# Altium PCB klor1_4_B.PcbDoc (part 2 of 2)
Units mm, origin at the board's own origin, x right, y up, seen from the top; angles counter-clockwise.
Board outline 323.11 x 118.19 mm, 2 copper layers (Top Layer, Bottom Layer); 172 components, 130 nets, 808 pads, 101 vias.
Unrouted connection lines stored in the file: 161.
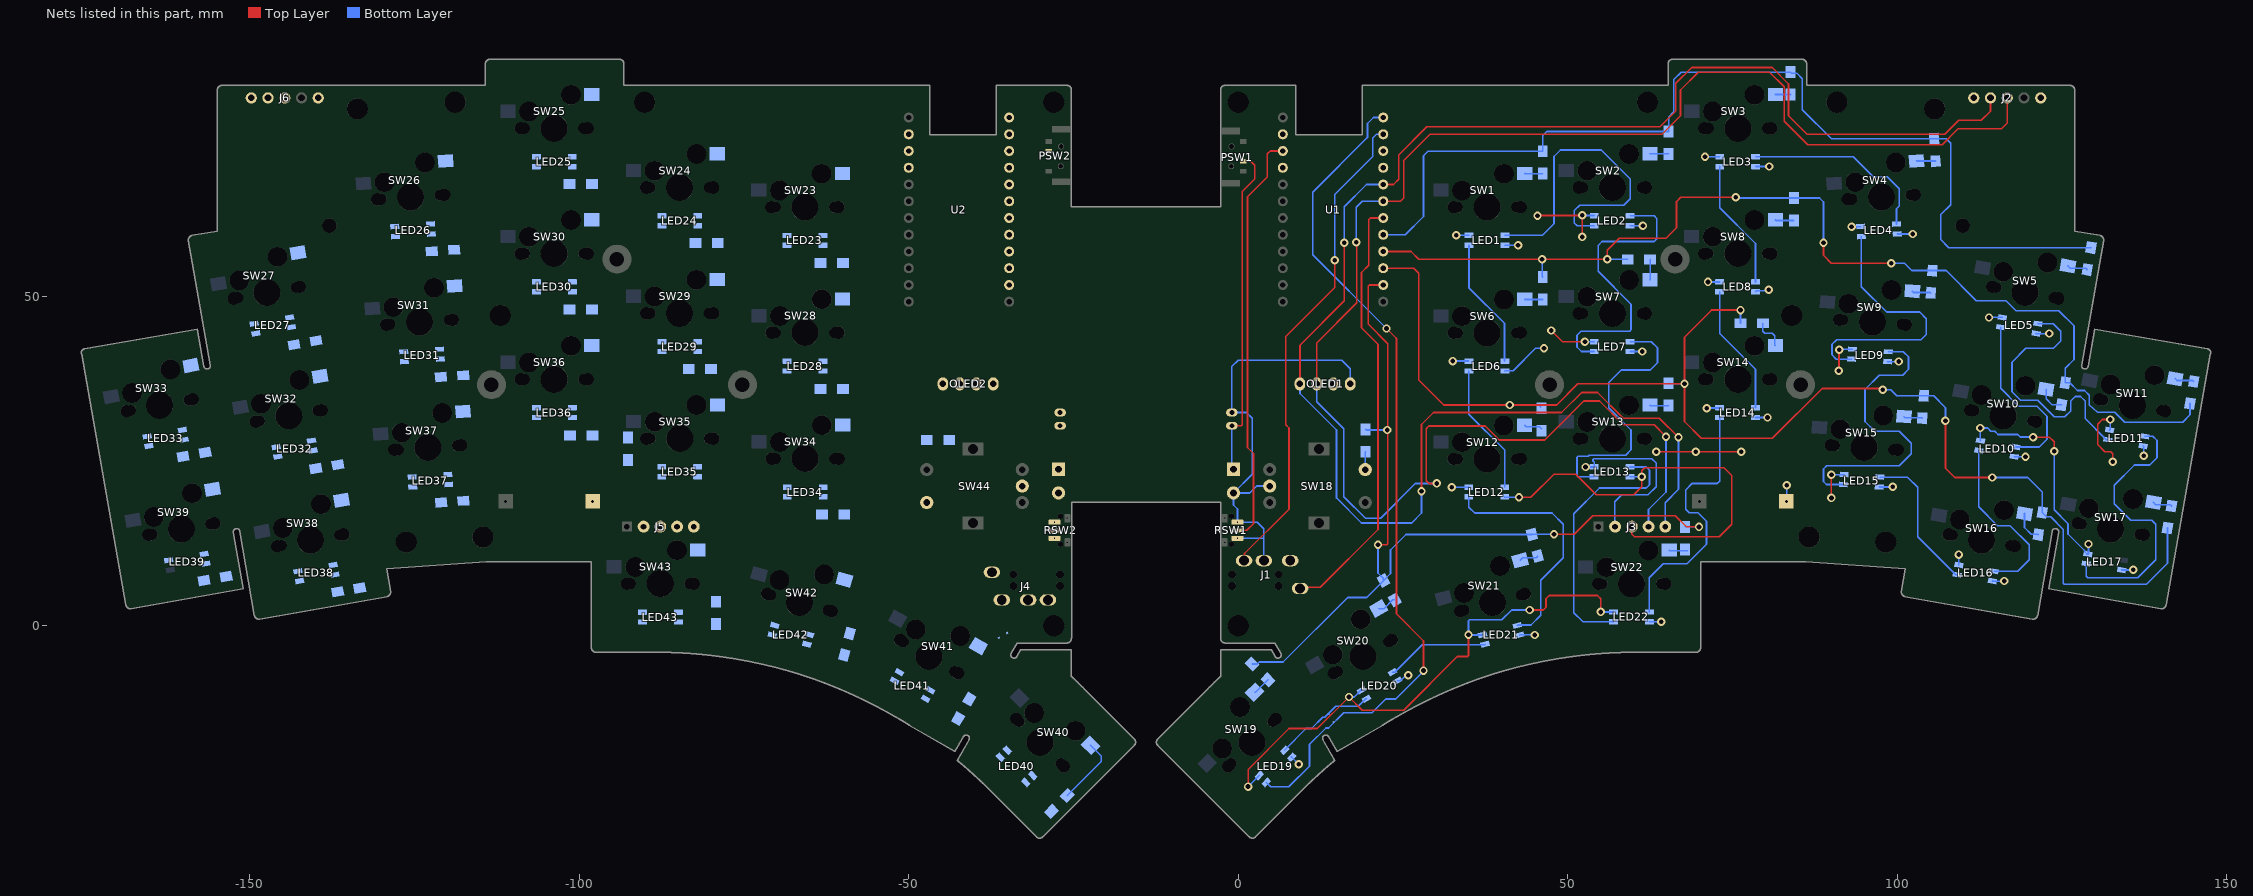
[diagram p2: the nets of this part, all layers, seen from the top]

## Via types
v1: diameter 1.27, hole 0.711, Top Layer to Bottom Layer, 101 vias

## Nets (pads, with @x,y where several pads share a name; then routed paths per layer and width w, separated by ;. In a path a pad name is that pad's centre, name@x,y a point inside that pad or via, vN(x,y) a via of type N, cw(c..) or ccw(c..) an arc to the next point about the centre after c; other vN are vias at no path point) (continued)
GND_R: BT1.2 BT2.2 BZ1.2 J1.2 J2.5 J3.2 LED1.2 LED2.2 LED3.2 LED4.2 LED5.2 LED6.2 LED7.2 LED8.2 LED9.2 LED10.2 LED11.2 LED12.2 LED13.2 LED14.2 LED15.2 LED16.2 LED17.2 LED19.2 LED20.2 LED21.2 LED22.2 OLED1.1 RSW1.1 SW18.C U1.3 U1.4 U1.23 | length 288.5
  Top Layer w0.254: v1(1.49,-24.4) 1.49,-21.81 7.7,-15.6 12,-15.6 v1(16.8,-10.8) 18.8,-12.8 25.1,-12.8 33.243,-4.657 34.794,-4.657 34.943,-4.508 v1(34.943,-1.357) ; v1(44.2,2.4) 46.3,2.4 46.7,2.8 46.7,4.1 47.2,4.6 54.5,4.6 55,4.1 v1(55,2.1) ; v1(45.4,62.2) 45.45,62.25 52.15,62.25 v1(52.2,62.3) 52.2,62.2 v1(52.2,59) ; v1(47.5,44.8) 49.2,43.1 v1(52.6,43.1) ; v1(63.4,26.4) v1(69.4,26.4) v1(76.3,26.4) ; v1(90,19.4) v1(90,22.9) ; v1(91.1,38.7) 91.15,38.75 91.15,41.85 v1(91.2,41.9) ; v1(120.6,28.6) 123.1,28.6 123.8,27.9 v1(123.8,26.5) ; v1(132.3,31.3) 131.1,31.3 130.4,30.6 130.4,27.5 131.5,26.4 132.4,26.4 132.7,26.1 v1(132.7,24.9)
  Bottom Layer w0.254: RSW1.1@-0.11,13.265 3.815,13.265 3.88,13.2 ; v1(1.49,-24.4) LED19.2@3.175,-22.715 ; J1.2@3.88,9.875 3.88,13.2 ; SW18.C@4.77,21.2 2.8,21.2 1.75,20.15 BT2.2@-0.725,20.15 ; v1(16.8,-10.8) 17.576,-10.8 18.598,-9.778 LED20.2@18.695,-9.778 ; OLED1.1@16.979,36.695 16.979,39.021 15.7,40.3 0,40.3 -0.97,39.33 BT1.2@-0.97,32.35 1.25,32.35 2.1,31.5 2.1,22.975 BT2.2@-0.725,20.15 ; v1(32.4,21) 32.424,21.024 34.954,21.024 LED12.2@34.978,21.047 ; v1(32.562,40.162) LED6.2@34.995,40.162 ; v1(33.056,59.256) LED1.2@34.997,59.256 ; LED21.2@37.055,-1.357 37.021,-1.391 34.977,-1.391 v1(34.943,-1.357) 34.943,0.743 35.1,0.9 40,0.9 41.5,2.4 v1(44.2,2.4) ; v1(52.2,62.3) 52.251,62.249 53.967,62.249 LED2.2@54.018,62.197 ; v1(52.6,43.1) 52.609,43.109 53.999,43.109 LED7.2@54.008,43.117 ; v1(52.7,24.1) LED13.2@53.993,24.1 ; LED13.2@53.994,24.099 53.994,24.838 53.825,25.007 53.825,25.217 53.974,25.366 62.734,25.366 63.4,24.7 63.4,21.1 62.168,19.867 58.167,19.867 57.135,18.835 57.135,15.085 J3.2@57.17,15.05 ; v1(55,2.1) 55.005,2.095 56.927,2.095 LED22.2@56.932,2.09 ; v1(70.823,71.177) LED3.2@73.058,71.177 ; v1(71.1,33) 71.15,33.05 72.995,33.05 LED14.2@73.044,33.099 ; v1(71.272,52.172) LED8.2@73.044,52.172 ; BZ1.2@83.175,18.86 83.2,18.885 v1(83.2,21.3) ; v1(90,22.9) 90.024,22.924 91.919,22.924 LED15.2@91.925,22.929 ; v1(91.2,41.9) 91.239,41.939 93.164,41.939 LED9.2@93.185,41.959 ; LED4.2@99.981,59.443 99.991,59.452 102.334,59.452 v1(102.343,59.443) ; v1(109.3,10.8) 109.3,9.252 LED16.2@109.333,9.22 ; LED10.2@112.62,28.082 112.6,28.102 v1(112.6,30) 113.7,30 114.2,29.5 114.8,29.5 115.279,29.021 118.279,29.021 118.657,28.643 120.557,28.643 v1(120.6,28.6) ; v1(113.92,46.78) 113.943,46.803 115.92,46.803 LED5.2@115.943,46.78 ; J2.5@121.76,80.1 J2.5@121.77,80.09 ; v1(123.8,26.5) 123.8,17.6 125.9,15.5 125.9,13.922 128.398,11.424 128.398,11.287 128.785,10.9 LED17.2@128.923,10.9 129,10.977 v1(129,12.4) ; LED11.2@132.203,29.7 132.3,29.797 v1(132.3,31.3) ; BT2.2@-0.725,20.15 -0.725,18.325 -0.11,17.71 RSW1.1@-0.11,15.715 2.885,15.715 3.88,14.72 3.88,13.2
LED: JP26.2 LED19.3 U1.1 | length 129.6
  Top Layer w0.254: v1(22.5,45.1) 23.926,43.674 24,43.6 24,1.8 28.1,-2.3 v1(28.1,-6.8)
  Bottom Layer w0.254: LED19.3@4.236,-23.776 4.906,-24.446 7.654,-24.446 10.8,-21.3 10.8,-18 13.3,-15.5 13.7,-15.5 16,-13.2 20.3,-13.2 22.381,-11.119 23.881,-11.119 28.1,-6.9 v1(28.1,-6.8) ; U1.1@21.999,77.114 20.514,77.114 19.6,76.2 19.6,74.1 11.3,65.8 11.3,56.3 v1(22.5,45.1)
LED_L: JP29.2 LED40.3 U2.1
NetBT1_1: BT1.1 BT2.1 PSW1.2 | length 50.5
  Top Layer w0.254: BT1.1@-0.97,30.35 0.443,30.35 0.592,30.499 0.592,65.892 2.5,67.8 2.5,69.887 1.9,70.487 0.794,70.487 PSW1.2@0.781,70.474
  Bottom Layer w0.254: BT1.1@-0.97,30.35 -0.97,23.995 BT2.1@-0.725,23.75
NetBT3_1: BT3.1 BT4.1 PSW2.2
NetD1_2: D1.2 SW1.2 | length 2.8
  Bottom Layer w0.254: SW1.2@43.465,68.64 43.505,68.6 D1.2@46.2,68.6
NetD2_2: D2.2 SW2.2 | length 2.8
  Bottom Layer w0.254: SW2.2@62.465,71.62 62.485,71.6 D2.2@65.3,71.6
NetD3_2: D3.2 SW3.2 | length 2.3
  Bottom Layer w0.254: SW3.2@81.505,80.6 D3.2@83.8,80.6
NetD4_2: D4.2 SW4.2 | length 2.9
  Bottom Layer w0.254: SW4.2@102.914,70.545 102.944,70.515 105.808,70.515 D4.2@105.819,70.504
NetD5_2: D5.2 SW5.2 | length 3.1
  Bottom Layer w0.254: SW5.2@125.897,54.592 126.247,54.243 128.588,54.243 D5.2@128.805,54.026
NetD6_2: D6.2 SW6.2 | length 2.8
  Bottom Layer w0.254: SW6.2@43.463,49.547 43.51,49.5 D6.2@46.2,49.5
NetD7_2: D7.2 SW7.2 | length 3.1
  Bottom Layer w0.254: SW7.2@62.476,52.502 62.5,52.526 D7.2@62.5,55.6
NetD8_2: D8.2 SW8.2 | length 2.8
  Bottom Layer w0.254: SW8.2@81.491,61.595 81.586,61.5 D8.2@84.3,61.5
NetD9_2: D9.2 SW9.2 | length 2.9
  Bottom Layer w0.254: SW9.2@102.268,50.77 102.458,50.58 105.005,50.58 D9.2@105.081,50.504
NetD10_2: D10.2 SW10.2 | length 4.2
  Bottom Layer w0.254: SW10.2@122.575,35.895 122.575,34.425 123.474,33.526 D10.2@124.905,33.526
NetD11_2: D11.2 SW11.2 | length 3
  Bottom Layer w0.254: SW11.2@142.157,37.512 142.443,37.227 144.843,37.227 D11.2@144.995,37.074
NetD12_2: D12.2 SW12.2 | length 2.8
  Bottom Layer w0.254: SW12.2@43.446,30.432 43.678,30.2 45.7,30.2 D12.2@46,29.9
NetD13_2: D13.2 SW13.2 | length 2.9
  Bottom Layer w0.254: SW13.2@62.462,33.484 62.546,33.4 D13.2@65.3,33.4
NetD14_2: D14.2 SW14.2 | length 4.8
  Bottom Layer w0.254: D14.2@79.6,45.9 79.6,44.7 79.9,44.4 81,44.4 81.4,44 81.4,42.614 SW14.2@81.491,42.522
NetD15_2: D15.2 SW15.2 | length 2.9
  Bottom Layer w0.254: SW15.2@101.008,31.74 101.183,31.565 103.72,31.565 D15.2@103.781,31.504
NetD16_2: D16.2 SW16.2 | length 4.7
  Bottom Layer w0.254: SW16.2@119.287,17.032 119.287,14.913 120.3,13.9 121.331,13.9 D16.2@121.405,13.826
NetD17_2: D17.2 SW17.2 | length 2.9
  Bottom Layer w0.254: SW17.2@138.877,18.712 139.213,18.377 141.393,18.377 D17.2@141.595,18.174
NetD19_2: D19.2 SW19.2 | length 2.8
  Bottom Layer w0.254: SW19.2@2.485,-10.079 2.625,-10.079 D19.2@4.502,-8.202
NetD20_2: D20.2 SW20.2 | length 3
  Bottom Layer w0.254: SW20.2@21.299,2.606 22.106,2.606 23.428,3.928 D20.2@23.75,3.928
NetD21_2: D21.2 SW21.2 | length 2.9
  Bottom Layer w0.254: SW21.2@42.776,9.931 43.163,10.319 45.201,10.319 D21.2@45.44,10.558
NetD22_2: D22.2 SW22.2 | length 2.8
  Bottom Layer w0.254: SW22.2@65.399,11.474 65.474,11.4 D22.2@68.2,11.4
NetD23_2: D23.2 SW23.2
NetD24_2: D24.2 SW24.2
NetD25_2: D25.2 SW25.2
NetD26_2: D26.2 SW26.2
NetD27_2: D27.2 SW27.2
NetD28_2: D28.2 SW28.2
NetD29_2: D29.2 SW29.2
NetD30_2: D30.2 SW30.2
NetD31_2: D31.2 SW31.2
NetD32_2: D32.2 SW32.2
NetD33_2: D33.2 SW33.2
NetD34_2: D34.2 SW34.2
NetD35_2: D35.2 SW35.2
NetD36_2: D36.2 SW36.2
NetD37_2: D37.2 SW37.2
NetD38_2: D38.2 SW38.2
NetD39_2: D39.2 SW39.2
NetD40_2: D40.2 SW40.2 | length 10.4
  Bottom Layer w0.254: D40.2@-25.955,-25.75 -20.8,-20.595 -20.8,-19.764 SW40.2@-22.424,-18.14
NetD41_2: D41.2 SW41.2
NetD42_2: D42.2 SW42.2
NetD43_2: D43.2 SW43.2
NetJP26_1: JP26.1 LED19.1 LED20.3 | length 15.6
  Bottom Layer w0.254: LED19.1@7.029,-18.861 10.29,-15.6 11.1,-15.6 12.828,-13.872 13.137,-13.872 ; 13.133,-13.867 14.8,-12.2 18.225,-12.2 19.348,-11.077 LED20.3@19.445,-11.077
NetJP29_1: JP29.1 LED40.1 LED41.3
NetLED1_1: LED1.1 LED2.3 | length 49.5
  Bottom Layer w0.254: LED1.1@40.447,59.256 46.156,59.256 47.9,61 47.9,71.2 48.9,72.2 55.1,72.2 59.5,67.8 59.5,64.8 58.5,63.8 51.8,63.8 51,63 51,61.124 51.449,60.675 53.996,60.675 LED2.3@54.018,60.697
NetLED1_3: LED1.3 LED6.1 | length 19.8
  Bottom Layer w0.254: LED1.3@34.997,57.756 34.997,51.303 40.4,45.9 40.4,40.208 LED6.1@40.445,40.162
NetLED2_1: LED2.1 LED7.3 | length 44.7
  Bottom Layer w0.254: LED7.3@54.008,41.617 52.083,41.617 51.4,42.3 51.4,44.1 52,44.7 59.4,44.7 59.6,44.9 59.6,48.8 54.6,53.8 54.6,57.7 55.2,58.3 63.1,58.3 63.5,58.7 63.5,61.8 63.103,62.197 LED2.1@59.468,62.197
NetLED3_1: LED3.1 LED4.3 | length 29.3
  Bottom Layer w0.254: LED3.1@78.508,71.177 93.323,71.177 96.35,68.15 98.45,68.15 100.3,66.3 100.3,63.694 99.877,63.271 LED4.3@99.877,60.939
NetLED3_3: LED3.3 LED8.1 | length 19.8
  Bottom Layer w0.254: LED3.3@73.058,69.677 73.058,63.442 78.494,58.006 LED8.1@78.494,52.172
NetLED4_1: LED4.1 LED9.3 | length 41.6
  Bottom Layer w0.254: LED9.3@93.08,40.463 90.737,40.463 90.1,41.1 90.1,42.7 90.8,43.4 103.6,43.4 104.4,44.2 104.4,46.6 103.4,47.6 98.4,47.6 94.545,51.455 LED4.1@94.545,59.063
NetLED5_1: LED5.1 LED11.3 | length 41.2
  Bottom Layer w0.254: LED5.1@121.31,45.833 123.667,45.833 124.8,44.7 124.8,43.2 123.7,42.1 119.5,42.1 117.4,40 117.4,35.5 118.7,34.2 121.3,34.2 123.8,31.7 125.4,31.7 126.3,32.6 126.3,34.1 127,34.8 127.8,34.8 128.5,34.1 128.5,31.45 131.727,28.222 LED11.3@131.942,28.222
NetLED5_3: LED5.3 LED10.1 | length 26.7
  Bottom Layer w0.254: LED5.3@115.682,45.302 115.682,36.018 118.4,33.3 121.2,33.3 122.7,31.8 122.7,28.3 121.536,27.136 LED10.1@117.987,27.136
NetLED6_3: LED6.3 LED12.1 | length 19.9
  Bottom Layer w0.254: LED6.3@34.995,38.662 34.995,32.105 40.428,26.672 LED12.1@40.428,21.047
NetLED7_1: LED7.1 LED13.3 | length 41.2
  Bottom Layer w0.254: LED13.3@53.994,22.599 51.549,22.599 51.4,22.748 51.4,25.551 51.549,25.7 53.082,25.7 53.256,25.874 58.774,25.874 59.6,26.7 59.6,29.7 56.2,33.1 56.2,36.9 58.1,38.8 62.5,38.8 63.6,39.9 63.6,42.2 62.683,43.117 LED7.1@59.458,43.117
NetLED8_3: LED8.3 LED14.1 | length 19.8
  Bottom Layer w0.254: LED8.3@73.044,50.672 73.044,44.356 78.494,38.906 LED14.1@78.494,33.099
NetLED9_1: LED9.1 LED15.3 | length 47.4
  Bottom Layer w0.254: LED15.3@91.82,21.433 89.249,21.433 88.8,21.882 88.8,23.8 89.3,24.3 100.3,24.3 102.1,26.1 102.1,27.7 100.3,29.5 96.6,29.5 95.1,31 95.1,35.86 97.24,38 100.8,38 101.7,38.9 101.7,40.8 100.921,41.579 LED9.1@98.621,41.579
NetLED10_3: LED10.3 LED16.1 | length 26.9
  Bottom Layer w0.254: LED10.3@112.359,26.605 112.359,18.041 115.2,15.2 117.1,15.2 120,12.3 120,10 118.273,8.273 LED16.1@114.7,8.273
NetLED11_1: LED11.1 LED17.3 | length 42.4
  Bottom Layer w0.254: LED17.3@128.662,9.422 128.662,7.538 128.9,7.3 136.5,7.3 139.2,10 139.2,15.4 138.6,16 135.4,16 132.9,18.5 132.9,21.3 136,24.4 138.3,24.4 139.395,25.495 139.395,28.105 138.747,28.753 LED11.1@137.57,28.753
NetLED12_3: LED12.3 LED21.1 | length 36.4
  Bottom Layer w0.254: LED12.3@34.978,19.547 34.978,18 35.878,17.1 47.6,17.1 49.3,15.4 49.3,10.3 45.9,6.9 45.9,1.6 44.422,0.122 42.388,0.122 LED21.1@42.32,0.053
NetLED13_1: LED13.1 LED22.3 | length 40.3
  Bottom Layer w0.254: LED22.3@56.932,0.59 52.31,0.59 50.9,2 50.9,17 54.8,20.9 61.9,20.9 62.4,21.4 62.4,23.6 61.901,24.099 LED13.1@59.444,24.099
NetLED14_3: LED14.3 LED22.1 | length 41.6
  Bottom Layer w0.254: LED22.1@62.382,2.09 62.382,7.3 64.482,9.4 68.1,9.4 71.05,12.35 71.05,15.85 69.75,17.15 68.45,17.15 67.9,17.7 67.9,20.6 68.9,21.6 72.7,21.6 73.044,21.944 LED14.3@73.044,31.599
NetLED15_1: LED15.1 LED16.3 | length 22.2
  Bottom Layer w0.254: LED15.1@97.361,22.549 101.551,22.549 103.1,21 103.1,13.5 108.857,7.742 LED16.3@109.072,7.742
NetLED20_1: LED20.1 LED21.3 | length 15.8
  Bottom Layer w0.254: LED20.1@23.415,-7.053 23.747,-7.053 27.925,-2.875 37.375,-2.875 LED21.3@37.444,-2.806
NetLED23_1: LED23.1 LED24.3
NetLED23_3: LED23.3 LED28.1
NetLED24_1: LED24.1 LED29.3
NetLED25_1: LED25.1 LED26.3
NetLED25_3: LED25.3 LED30.1
NetLED26_1: LED26.1 LED31.3
NetLED27_1: LED27.1 LED33.3
NetLED27_3: LED27.3 LED32.1
NetLED28_3: LED28.3 LED34.1
NetLED29_1: LED29.1 LED35.3
NetLED30_3: LED30.3 LED36.1
NetLED31_1: LED31.1 LED37.3
NetLED32_3: LED32.3 LED38.1
NetLED33_1: LED33.1 LED39.3
NetLED34_3: LED34.3 LED42.1
NetLED35_1: LED35.1 LED43.3
NetLED36_3: LED36.3 LED43.1
NetLED37_1: LED37.1 LED38.3
NetLED41_1: LED41.1 LED42.3
PAD2: BT3.2 BT4.2 BZ2.2 J4.2 J5.2 J6.5 LED23.2 LED24.2 LED25.2 LED26.2 LED27.2 LED28.2 LED29.2 LED30.2 LED31.2 LED32.2 LED33.2 LED34.2 LED35.2 LED36.2 LED37.2 LED38.2 LED39.2 LED40.2 LED41.2 LED42.2 LED43.2 OLED2.1 RSW2.1 SW44.C U2.3 U2.4 U2.23 | length 0
  Bottom Layer w0.254: J6.5@-139.602,80.098 J6.5@-139.6,80.1
RESET: RSW1.2 U1.22 | length 63.1
  Top Layer w0.254: RSW1.2@-0.11,14.49 1.29,14.49 2.3,15.5 2.3,26.15 1.4,27.05 1.4,65.1 4.4,68.1 4.4,71.6 4.834,72.034 U1.22@6.759,72.034
RESET_L: RSW2.2 U2.22
row0: D1.1 D2.1 D3.1 D4.1 D5.1 U1.8 | length 153
  Bottom Layer w0.254: U1.8@21.999,59.334 25.334,59.334 28.1,62.1 28.1,71.3 28.8,72 D1.1@46.2,72 46.2,74.4 46.8,75 D2.1@65.3,75 65.3,77.2 66.1,78 66.1,82.9 67.2,84 D3.1@83.8,84 83.982,83.818 84.782,83.818 85.6,83 85.6,78.3 90.004,73.896 D4.1@105.581,73.896 107.404,73.896 108.1,73.2 108.1,63.9 106.6,62.4 106.6,58.6 107.826,57.374 D5.1@129.395,57.374
row0_L: D23.1 D24.1 D25.1 D26.1 D27.1 U2.8
row1: D6.1 D7.1 D8.1 D9.1 D10.1 D11.1 U1.9 | length 164.5
  Top Layer w0.254: U1.9@21.999,56.794 26.206,56.794 27.4,55.6 v1(46.1,55.6) v1(56,55.6) 56,57 57.8,58.8 64.9,58.8 66.5,60.4 66.5,64.363 67.137,65 v1(75.5,65) ; v1(88.8,58.1) 88.8,56.2 90,55 v1(99.1,55)
  Bottom Layer w0.254: v1(46.1,55.6) 46.1,53 D6.1@46.2,52.9 ; v1(56,55.6) D7.1@59.1,55.6 ; v1(75.5,65) 75.6,64.9 D8.1@84.3,64.9 88.2,64.9 88.8,64.3 v1(88.8,58.1) ; v1(99.1,55) 101.1,55 102.204,53.896 D9.1@105.319,53.896 107.404,53.896 112,49.3 116.5,49.3 118,47.8 124.5,47.8 126.8,45.5 126.8,40.4 125.495,39.095 D10.1@125.495,36.874 126.181,36.874 127.35,35.705 128.395,35.705 129.1,35 129.1,33.527 ccw(c197.523,109.886) 130.379,32.4 133,32.4 134.5,30.9 143.3,30.9 144.405,32.005 D11.1@144.405,33.726
row1_L: D28.1 D29.1 D30.1 D31.1 D32.1 D33.1 U2.9
row2: D12.1 D13.1 D14.1 D15.1 D16.1 D17.1 U1.10 | length 205.8
  Top Layer w0.254: U1.10@21.999,54.254 26.646,54.254 27.4,53.5 27.4,37.3 31.2,33.5 v1(41.2,33.5) 48.3,33.5 51.5,36.7 v1(67.7,36.7) ; v1(76.2,47.9) 71.8,47.9 67.7,43.8 v1(67.7,36.7) ; v1(97.8,35.8) 97.606,35.994 97.149,35.994 97.143,36 88.6,36 81.029,28.429 70.271,28.429 67.7,31 v1(67.7,36.7) ; v1(107.3,31.1) 107.3,23.9 108.7,22.5 v1(114.4,22.5)
  Bottom Layer w0.254: v1(41.2,33.5) 45.6,33.5 D12.1@45.9,33.2 ; D13.1@65.3,36.8 65.4,36.7 v1(67.7,36.7) ; D14.1@76.2,45.9 v1(76.2,47.9) ; v1(97.8,35.8) 99,35.8 99.904,34.896 D15.1@104.019,34.896 105.504,34.896 107.3,33.1 v1(107.3,31.1) ; v1(114.4,22.5) 119.8,22.5 121.995,20.305 D16.1@121.995,17.174 122.64,16.529 123.271,16.529 125.2,14.6 125.2,6.449 125.349,6.3 137.818,6.3 141.005,9.487 D17.1@141.005,14.826
row2_L: D34.1 D35.1 D36.1 D37.1 D38.1 D39.1 U2.10
row3: D18.1 D19.1 D20.1 D21.1 D22.1 U1.11 | length 135.4
  Top Layer w0.254: v1(21.2,12.3) 22.551,12.3 22.7,12.449 22.7,29.6 v1(22.6,29.7) 22.7,29.8 22.7,42.8 19.714,45.786 19.714,51.565 19.863,51.714 U1.11@21.999,51.714 ; v1(47.9,13.9) 51,13.9 53.8,16.7 66.3,16.7 68,15 v1(69.9,15)
  Bottom Layer w0.254: D19.1@2.098,-5.798 2.891,-5.798 3.189,-5.5 6.8,-5.5 16.6,4.3 19.478,4.3 D20.1@22.05,6.872 23.1,7.922 23.1,11.5 25.442,13.842 D21.1@44.56,13.842 44.618,13.9 v1(47.9,13.9) ; D18.1@19.3,29.8 19.4,29.7 v1(22.6,29.7) ; v1(21.2,12.3) 21.2,8 21.975,7.225 D20.1@21.975,6.947 ; D22.1@67.8,15 v1(69.9,15)
row3_L: D40.1 D41.1 D42.1 D43.1 D44.1 U2.11
RX: J1.3 U1.7 | length 66.3
  Top Layer w0.254: J1.3@9.38,5.675 9.549,5.844 12.444,5.844 21.2,14.6 21.2,42.7 18.7,45.2 18.7,53.6 19.8,54.7 19.8,61.6 20.074,61.874 U1.7@21.999,61.874
RX_L: J4.3 U2.7
SCL: J2.3 J3.4 OLED1.3 U1.6 | length 258
  Top Layer w0.254: OLED1.3@11.899,36.695 11.899,42.899 18,49 18,58.1 v1(17.9,58.2) ; U1.6@21.999,64.414 24.614,64.414 25.1,64.9 25.1,70.6 29.1,74.6 64.3,74.6 67.1,77.4 67.1,81.3 69.8,84 80.6,84 82.829,81.771 82.829,76.571 86.4,73 106.8,73 109.2,75.4 115.8,75.4 116.68,76.28 J2.3@116.68,80.1 ; v1(30.1,21.6) 28.9,21.6 28.5,22 28.5,29.9 28.9,30.3 37.5,30.3 39.6,28.2 46.5,28.2 52.4,34.1 54.8,34.1 58.4,30.5 63.1,30.5 v1(64.9,28.7)
  Bottom Layer w0.254: OLED1.3@11.899,36.695 11.899,34.001 16,29.9 16,19.6 19.3,16.3 21.6,16.3 26.9,21.6 v1(30.1,21.6) ; v1(17.9,58.2) 17.9,63.5 18.814,64.414 U1.6@21.999,64.414 ; J3.4@62.25,15.05 62.25,17.65 64.9,20.3 v1(64.9,28.7)
SCL_L: J5.4 J6.3 OLED2.3 U2.6
SDA: J2.2 J3.5 OLED1.4 U1.5 | length 257.9
  Top Layer w0.254: OLED1.4@9.359,36.695 9.359,42.559 16.1,49.3 v1(16.1,58.1) ; U1.5@21.999,66.954 23.554,66.954 24.327,67.727 24.327,71.427 28.6,75.7 64,75.7 66.4,78.1 66.4,82.3 68.8,84.7 81,84.7 83.5,82.2 83.5,77.4 86.3,74.6 107.2,74.6 109.3,76.7 112.75,76.7 114.14,78.09 J2.2@114.14,80.1 ; v1(27.8,20.4) 27.8,30.538 29.612,32.35 39.583,32.35 49.05,32.35 52.1,35.4 54.5,35.4 58.4,31.5 63.9,31.5 v1(66.8,28.6)
  Bottom Layer w0.254: OLED1.4@9.359,36.695 9.359,35.241 14.9,29.7 14.9,19.4 18.7,15.6 26.3,15.6 27.8,17.1 v1(27.8,20.4) ; v1(16.1,58.1) 16.1,63.6 19.454,66.954 U1.5@21.999,66.954 ; J3.5@64.79,15.05 64.785,15.055 64.785,18.685 66.8,20.7 v1(66.8,28.6)
SDA_L: J5.5 J6.2 OLED2.4 U2.5 | length 0
  Bottom Layer w0.254: J6.2@-147.22,80.1 J6.2@-147.212,80.092
SW18B: D18.2 SW18.S2 | length 2.7
  Bottom Layer w0.254: SW18.S2@19.27,23.7 19.27,26.37 D18.2@19.3,26.4
SW18B_L: D44.2 SW44.S2
TX: J1.4 U1.2 | length 74.5
  Top Layer w0.254: J1.4@0.88,9.875 0.957,9.952 0.957,10.957 7.7,17.7 7.7,30 7.2,30.5 7.2,43.9 14.63,51.33 v1(14.63,55.47)
  Bottom Layer w0.254: v1(14.63,55.47) 14.63,65.43 20.4,71.2 20.4,74 20.974,74.574 U1.2@21.999,74.574
TX_L: J4.4 U2.2
VCC: J1.1 J2.1 J3.3 LED1.4 LED2.4 LED3.4 LED4.4 LED5.4 LED6.4 LED7.4 LED8.4 LED9.4 LED10.4 LED11.4 LED12.4 LED13.4 LED14.4 LED15.4 LED16.4 LED17.4 LED19.4 LED20.4 LED21.4 LED22.4 OLED1.2 U1.21 | length 108.1
  Top Layer w0.254: v1(42.6,19.5) 44.4,19.5 47.9,23 51.2,23 54.3,19.9 60,19.9 61.2,21.1 v1(61.2,22.6) 61.2,23.5 61.7,24 73.7,24 74.9,22.8 74.9,15.4 73,13.5 60.131,13.5 59.713,13.918 59.713,15.047 J3.3@59.71,15.05
  Bottom Layer w0.254: LED19.4@8.09,-19.922 9.168,-21 v1(9.2,-21) ; LED20.4@24.165,-8.352 24.581,-8.352 25.239,-7.694 25.606,-7.694 v1(25.8,-7.5) ; LED12.4@40.428,19.547 40.452,19.524 42.576,19.524 v1(42.6,19.5) ; LED6.4@40.445,38.662 40.483,38.7 41.7,38.7 45.1,42.1 v1(46.4,42.1) ; LED1.4@40.447,57.756 v1(42.456,57.756) ; LED21.4@42.708,-1.396 42.742,-1.361 44.961,-1.361 v1(44.996,-1.396) ; LED13.4@59.445,22.6 v1@61.2,22.6 ; LED7.4@59.458,41.617 v1(61.317,41.617) ; LED2.4@59.468,60.697 59.469,60.699 v1(61.4,60.7) v1(61.4,60.7) ; LED22.4@62.382,0.59 62.387,0.595 64.195,0.595 v1(64.2,0.6) ; LED14.4@78.495,31.6 v1(80.3,31.6) ; LED8.4@78.494,50.672 78.659,50.836 80.336,50.836 v1(80.5,51) ; LED3.4@78.508,69.677 v1(80.573,69.677) ; v1(93.059,60.559) 93.068,60.55 94.431,60.55 LED4.4@94.44,60.559 ; LED15.4@97.257,21.053 97.271,21.067 99.267,21.067 v1(99.3,21.1) ; LED9.4@98.517,40.083 100.182,40.082 v1(100.2,40.1) ; J2.1@111.6,80.1 J2.1@111.602,80.097 ; LED16.4@114.439,6.796 114.462,6.773 116.181,6.773 v1(116.204,6.796) ; LED10.4@117.726,25.658 117.749,25.635 119.419,25.635 v1(119.442,25.658) ; LED5.4@121.049,44.356 121.072,44.333 123.021,44.333 v1(123.044,44.356) ; LED17.4@134.029,8.476 134.04,8.465 135.765,8.465 v1(135.8,8.5) ; LED11.4@137.309,27.276 137.4,27.185 v1(137.4,25.8)
VCC_L: J4.1 J5.3 J6.1 LED23.4 LED24.4 LED25.4 LED26.4 LED27.4 LED28.4 LED29.4 LED30.4 LED31.4 LED32.4 LED33.4 LED34.4 LED35.4 LED36.4 LED37.4 LED38.4 LED39.4 LED40.4 LED41.4 LED42.4 LED43.4 OLED2.2 U2.21 | length 0
  Bottom Layer w0.254: J6.1@-149.77,80.09 J6.1@-149.76,80.1
pads on no net: J1.Un1 J1.Un2 J1.Un3 J1.Un4 J2.4 J3.1 J4.Un1 J4.Un2 J4.Un3 J4.Un4 J5.1 J6.4 LED17.1 LED39.1 MH1.Un1 MH2.Un1 MH3.Un1 MH4.Un1 MH5.Un1 MH6.Un1 MH7.Un1 MH8.Un1 MH9.Un1 MH10.Un1 MH11.Un1 MH12.Un1 MH13.Un1 MH14.Un1 MH15.Un1 MH16.Un1 MH17.Un1 MH18.Un1 PSW1.1 PSW1.NC PSW1.Un1 PSW1.Un2 PSW2.1 PSW2.NC PSW2.Un1 PSW2.Un2 RSW1.MP RSW1.Un1 RSW1.Un2 RSW2.MP RSW2.Un1 RSW2.Un2 SW1.Un1 SW1.Un2 SW1.Un4 SW1.Un5 SW1.Un7 SW1.Un8 SW1.Un9 SW2.Un1 SW2.Un2 SW2.Un4 SW2.Un5 SW2.Un7 SW2.Un8 SW2.Un9 SW3.Un1 SW3.Un2 SW3.Un4 SW3.Un5 SW3.Un7 SW3.Un8 SW3.Un9 SW4.Un1 SW4.Un2 SW4.Un4 SW4.Un5 SW4.Un7 SW4.Un8 SW4.Un9 SW5.Un1 SW5.Un2 SW5.Un4 SW5.Un5 SW5.Un7 SW5.Un8 SW5.Un9 SW6.Un1 SW6.Un2 SW6.Un4 SW6.Un5 SW6.Un7 SW6.Un8 SW6.Un9 SW7.Un1 SW7.Un2 SW7.Un4 SW7.Un5 SW7.Un7 SW7.Un8 SW7.Un9 SW8.Un1 SW8.Un2 SW8.Un4 SW8.Un5 SW8.Un7 SW8.Un8 SW8.Un9 SW9.Un1 SW9.Un2 SW9.Un4 SW9.Un5 SW9.Un7 SW9.Un8 SW9.Un9 SW10.Un1 SW10.Un2 SW10.Un4 SW10.Un5 SW10.Un7 SW10.Un8 SW10.Un9 SW11.Un1 SW11.Un2 SW11.Un4 SW11.Un5 SW11.Un7 SW11.Un8 SW11.Un9 SW12.Un1 SW12.Un2 SW12.Un4 SW12.Un5 SW12.Un7 SW12.Un8 SW12.Un9 SW13.Un1 SW13.Un2 SW13.Un4 SW13.Un5 SW13.Un7 SW13.Un8 SW13.Un9 SW14.Un1 SW14.Un2 SW14.Un4 SW14.Un5 SW14.Un7 SW14.Un8 SW14.Un9 SW15.Un1 SW15.Un2 SW15.Un4 SW15.Un5 SW15.Un7 SW15.Un8 SW15.Un9 SW16.Un1 SW16.Un2 SW16.Un4 SW16.Un5 SW16.Un7 SW16.Un8 SW16.Un9 SW17.Un1 SW17.Un2 SW17.Un4 SW17.Un5 SW17.Un7 SW17.Un8 SW17.Un9 SW18.MP SW19.Un1 SW19.Un2 SW19.Un4 SW19.Un5 SW19.Un7 SW19.Un8 SW19.Un9 SW20.Un1 SW20.Un2 SW20.Un4 SW20.Un5 SW20.Un7 SW20.Un8 SW20.Un9 SW21.Un1 SW21.Un2 SW21.Un4 SW21.Un5 SW21.Un7 SW21.Un8 SW21.Un9 SW22.Un1 SW22.Un2 SW22.Un4 SW22.Un5 SW22.Un7 SW22.Un8 SW22.Un9 SW23.Un1 SW23.Un2 SW23.Un4 SW23.Un5 SW23.Un7 SW23.Un8 SW23.Un9 SW24.Un1 SW24.Un2 SW24.Un4 SW24.Un5 SW24.Un7 SW24.Un8 SW24.Un9 SW25.Un1 SW25.Un2 SW25.Un4 SW25.Un5 SW25.Un7 SW25.Un8 SW25.Un9 SW26.Un1 SW26.Un2 SW26.Un4 SW26.Un5 SW26.Un7 SW26.Un8 SW26.Un9 SW27.Un1 SW27.Un2 SW27.Un4 SW27.Un5 SW27.Un7 SW27.Un8 SW27.Un9 SW28.Un1 SW28.Un2 SW28.Un4 SW28.Un5 SW28.Un7 SW28.Un8 SW28.Un9 SW29.Un1 SW29.Un2 SW29.Un4 SW29.Un5 SW29.Un7 SW29.Un8 SW29.Un9 SW30.Un1 SW30.Un2 SW30.Un4 SW30.Un5 SW30.Un7 SW30.Un8 SW30.Un9 SW31.Un1 SW31.Un2 SW31.Un4 SW31.Un5 SW31.Un7 SW31.Un8 SW31.Un9 SW32.Un1 SW32.Un2 SW32.Un4 SW32.Un5 SW32.Un7 SW32.Un8 SW32.Un9 SW33.Un1 SW33.Un2 SW33.Un4 SW33.Un5 SW33.Un7 SW33.Un8 SW33.Un9 SW34.Un1 SW34.Un2 SW34.Un4 SW34.Un5 SW34.Un7 SW34.Un8 SW34.Un9 SW35.Un1 SW35.Un2 SW35.Un4 SW35.Un5 SW35.Un7 SW35.Un8 SW35.Un9 SW36.Un1 SW36.Un2 SW36.Un4 SW36.Un5 SW36.Un7 SW36.Un8 SW36.Un9 SW37.Un1 SW37.Un2 SW37.Un4 SW37.Un5 SW37.Un7 SW37.Un8 SW37.Un9 SW38.Un1 SW38.Un2 SW38.Un4 SW38.Un5 SW38.Un7 SW38.Un8 SW38.Un9 SW39.Un1 SW39.Un2 SW39.Un4 SW39.Un5 SW39.Un7 SW39.Un8 SW39.Un9 SW40.Un1 SW40.Un2 SW40.Un4 SW40.Un5 SW40.Un7 SW40.Un8 SW40.Un9 SW41.Un1 SW41.Un2 SW41.Un4 SW41.Un5 SW41.Un7 SW41.Un8 SW41.Un9 SW42.Un1 SW42.Un2 SW42.Un4 SW42.Un5 SW42.Un7 SW42.Un8 SW42.Un9 SW43.Un1 SW43.Un2 SW43.Un4 SW43.Un5 SW43.Un7 SW43.Un8 SW43.Un9 SW44.MP TP1.1 TP2.1

## Polygon pours and split planes (outlines as drawn)
GND_R on Bottom Layer "F.Cu-" (solid, remove dead copper, pour order 2): 87.08,82.85 127.93,82.975 127.955,60.7 132.63,59.9 130.105,46 148.605,42.7 141.205,1.425 122.78,4.9 121.88,-0.125 99.555,3.975 100.255,7.85 86.255,8.95 71.005,8.9 70.78,-5.025 60.63,-5 52.33,-5.35 44.68,-6.65 34.63,-9.75 25.13,-14.275 15.63,-20 15.73,-20.55 2.23,-33.65 -13.795,-17.5 -3.495,-7.325 -3.47,82.725 -3.32,82.725 9.255,82.675 9.28,75.325 17.93,75.3 17.93,82.675 64.48,82.825 64.505,86.6 87.055,86.6
VCC on Top Layer "F.Cu-" (solid, remove dead copper, pour order 12): 87.08,82.85 127.93,82.975 127.955,60.7 132.63,59.9 130.105,46 148.605,42.7 141.205,1.425 122.78,4.9 121.88,-0.125 99.555,3.975 100.255,7.85 86.255,8.95 71.005,8.9 70.78,-5.025 60.63,-5 52.33,-5.35 44.68,-6.65 34.63,-9.75 25.13,-14.275 15.63,-20 15.73,-20.55 2.23,-33.65 -13.795,-17.5 -3.495,-7.325 -3.47,82.725 -3.32,82.725 9.255,82.675 9.28,75.325 17.93,75.3 17.93,82.675 64.48,82.825 64.505,86.6 87.055,86.6

## Other copper
Top Layer:
  region: -101.672,20.969 -101.67,20.969 -101.674,20.969
  region: 79.875,20.967 79.873,20.967 79.877,20.967
  region: 13.346,38.923 13.346,38.922 13.346,38.923
Bottom Layer:
  region: 73.672,20.969 73.67,20.969 73.674,20.969
  region: -44.239,48.386 -42.84,46.314 -42.386,46.742 -42.395,46.753 -43.85,48.739 hole: -43.864,48.604 -42.507,46.753 -42.825,46.454 -44.12,48.372
  region: 87 vertices and 21 holes, not listed, extent -45.864,39.763 -36.732,48.386

## Silkscreen, mask and mechanical layers (free items; w line width, h text height)
Top Overlay:
  drawing of 19 lines, arcs and shapes, not listed
  text "BATT+--" at -50.43,78.163 h0.6
  text "--LED" at -32.929,78.174 h0.6
  text "--LED" at 23.623,76.99 h0.6
  text "BATT+--" at 3.721,76.979 h0.6
  text "GND--" at -50.056,75.62 h0.6
  text "--TX" at -32.929,75.634 h0.6
  text "--TX" at 23.623,74.45 h0.6
  text "GND--" at 4.096,74.436 h0.6
  text "RST--" at -49.898,73.08 h0.6
  text "--GND" at -32.929,73.09 h0.6
  text "RST--" at 4.254,71.896 h0.6
  text "--GND" at 23.623,71.906 h0.6
  text "VCC--" at -49.939,70.54 h0.6
  text "--GND" at -32.929,70.55 h0.6
  text "VCC--" at 4.213,69.356 h0.6
  text "--GND" at 23.623,69.366 h0.6
  text "ENC A--" at -50.317,68 h0.6
  text "--SDA" at -32.929,68.01 h0.6
  text "ENC A--" at 3.835,66.816 h0.6
  text "--SDA" at 23.623,66.826 h0.6
  text "ENC B--" at -50.332,65.46 h0.6
  text "--SCL" at -32.929,65.47 h0.6
  text "ENC B--" at 3.82,64.276 h0.6
  text "--SCL" at 23.623,64.286 h0.6
  text "COL0--" at -50.149,62.919 h0.6
  text "--RX" at -32.929,62.934 h0.6
  text "HAPTIC BUZZ" at -149.328,61.773 h0.8
  text "--RX" at 23.623,61.75 h0.6
  text "HAPTIC BUZZ" at 118.882,61.773 h0.8
  text "COL0--" at 4.002,61.735 h0.6
  text "COL1--" at -50.154,60.38 h0.6
  text "--ROW0" at -32.929,60.389 h0.6
  text "COL1--" at 3.997,59.196 h0.6
  text "--ROW0" at 23.623,59.205 h0.6
  text "COL2--" at -50.149,57.84 h0.6
  text "--ROW1" at -32.929,57.85 h0.6
  text "COL2--" at 4.002,56.656 h0.6
  text "--ROW1" at 23.623,56.666 h0.6
  text "MOUNT MCU ON BOTTOM / COMPONENTS FACING PCB" at -41.107,56.6 h0.8 r90
  text "MOUNT MCU ON BOTTOM / COMPONENTS FACING PCB" at 14.203,56.55 h0.8 r90
  text "TENTING / PUCK" at -91.73,55.727 h0.8
  text "COL3--" at -50.149,55.299 h0.6
  text "--ROW2" at -32.929,55.31 h0.6
  text "COL3--" at 4.002,54.115 h0.6
  text "--ROW2" at 23.623,54.126 h0.6
  text "COL4--" at -50.149,52.76 h0.6
  text "--ROW3" at -32.929,52.769 h0.6
  text "TENTING / PUCK" at 48.1,52.6 h0.8
  text "COL4--" at 4.002,51.576 h0.6
  text "--ROW3" at 23.623,51.585 h0.6
  text "COL5--" at -50.149,50.219 h0.6
  text "--AUDIO" at -32.929,50.23 h0.6
  text "COL5--" at 4.002,49.035 h0.6
  text "--AUDIO" at 23.623,49.046 h0.6
  text "OLED" at -53.908,34.023 h0.8
  text "OLED" at 24.952,34.023 h0.8
  text "BATT" at -32.683,27.403 h0.8
  text "BATT" at 3.827,27.403 h0.8
  text "BUZZER" at -100.453,23.976 h0.8
  text "BATT" at -27.703,21.728 h0.8
  text "BATT" at -1.153,21.728 h0.8
  text "ENC" at -45.723,14.273 h0.8
  text "ENC" at 17.037,14.273 h0.8
  text "BUZZER" at 70.93,13.251 h0.8
  text "RST" at 1.837,12.098 h0.8
  text "TRACK / BALL" at -84.193,11.69 h0.76
Bottom Overlay:
  drawing of 55 lines, arcs and shapes, not listed
  text "VCC" at 111.979,78.023 h0.76
  text "SDA" at 114.593,78.023 h0.76
  text "SCL" at 117.044,78.023 h0.76
  text "GND" at 122.147,78.023 h0.76
  text "--LED" at -50.523,76.99 h0.6
  text "BATT+--" at -33.021,76.979 h0.6
  text "VCC" at -149.471,75.023 h0.76
  text "SDA" at -146.857,75.023 h0.76
  text "SCL" at -144.406,75.023 h0.76
  text "GND" at -139.303,75.023 h0.76
  text "--TX" at -50.523,74.45 h0.6
  text "GND--" at -33.396,74.436 h0.6
  text "--GND" at -50.523,71.906 h0.6
  text "RST--" at -33.554,71.896 h0.6
  text "--GND" at -50.523,69.366 h0.6
  text "VCC--" at -33.513,69.356 h0.6
  text "--SDA" at -50.523,66.826 h0.6
  text "ENC A--" at -33.135,66.816 h0.6
  text "--SCL" at -50.523,64.286 h0.6
  text "ENC B--" at -33.12,64.276 h0.6
  text "HAPTIC BUZZ" at -146.882,61.773 h0.8
  text "--RX" at -50.523,61.75 h0.6
  text "HAPTIC BUZZ" at 121.328,61.773 h0.8
  text "COL0--" at -33.302,61.735 h0.6
  text "--ROW0" at -50.523,59.205 h0.6
  text "COL1--" at -33.297,59.196 h0.6
  text "--ROW1" at -50.523,56.666 h0.6
  text "COL2--" at -33.302,56.656 h0.6
  text "MOUNT MCU ON BOTTOM / COMPONENTS FACING PCB" at 13.107,56.6 h0.8 r270
  text "MOUNT MCU ON BOTTOM / COMPONENTS FACING PCB" at -42.203,56.55 h0.8 r270
  text "TENTING / PUCK" at -90.229,55.902 h0.8
  text "--ROW2" at -50.523,54.126 h0.6
  text "COL3--" at -33.302,54.115 h0.6
  text "TENTING / PUCK" at 49.7,52.5 h0.8
  text "--ROW3" at -50.523,51.585 h0.6
  text "COL4--" at -33.302,51.576 h0.6
  text "--AUDIO" at -50.523,49.046 h0.6
  text "COL5--" at -33.302,49.035 h0.6
  text "OLED" at -52.952,34.023 h0.8
  text "OLED" at 25.908,34.023 h0.8
  text "RED" at -33.905,31.884 h0.6
  text "BLK" at 13.097,31.638 h0.6
  text "GND" at -44.507,31.143 h0.76
  text "VCC" at -41.93,31.143 h0.76
  text "SCL" at -39.462,31.143 h0.76
  text "SDA" at -36.959,31.159 h0.76
  text "GND" at 17.405,31.082 h0.76
  text "SDA" at 9.622,30.97 h0.76
  text "SCL" at 12.304,30.97 h0.76
  text "BLK" at -33.905,28.584 h0.6
  text "RED" at 7.655,28.584 h0.6
  text "VCC" at 12.752,28.52 h0.76
  text "BATT" at -31.827,27.403 h0.8
  text "BATT" at 4.683,27.403 h0.8
  text "BUZZER" at 72.453,23.976 h0.8
  text "BATT" at -26.847,21.728 h0.8
  text "BATT" at -0.297,21.728 h0.8
  text "GND" at -89.988,19.213 h0.76
  text "GND" at -89.988,19.213 h0.76
  text "VCC" at -87.411,19.213 h0.76
  text "VCC" at -87.411,19.213 h0.76
  text "SCL" at -84.942,19.213 h0.76
  text "SDA" at -82.339,19.213 h0.76
  text "GND" at 57.497,19.213 h0.76
  text "VCC" at 60.074,19.213 h0.76
  text "SCL" at 62.542,19.213 h0.76
  text "SDA" at 65.146,19.213 h0.76
  text "TRACK / BALL" at -80.225,16.799 h0.76
  text "ENC" at -45.037,14.273 h0.8
  text "ENC" at 17.723,14.273 h0.8
  text "BUZZER" at -98.93,13.251 h0.8
Top Solder:
  region: -101.686,20.968 -101.683,20.968 -101.687,20.968
Bottom Solder:
  region: -107.867,20.964 -107.866,20.964 -107.87,20.964
  region: 73.686,20.968 73.683,20.968 73.687,20.968
  region: -44.24,48.387 -42.841,46.315 -42.388,46.742 -42.396,46.754 -43.851,48.74 hole: -43.865,48.605 -42.508,46.754 -42.826,46.454 -44.121,48.372
  region: 82 vertices and 21 holes, not listed, extent -45.865,39.763 -36.734,48.387
Board Shape:
  drawing of 53985 lines, arcs and shapes, not listed
Mechanical 21:
  drawing of 680 lines, arcs and shapes, not listed

## Text inside footprints (layer, text, board x,y; h text height)
J1: Top Overlay "TRRS" at 2.879,6.543 h0.8
J4: Top Overlay "TRRS" at -30.879,7.257 h0.8 r180